# Altium PCB PCB_D1 mini AHT20 BMP150_2022-06-01.pcbdoc
Units mil, origin at the board's own origin, x right, y up, seen from the top; angles counter-clockwise.
Board outline 2010 x 2267.8 mil, 2 copper layers (Top Layer, Bottom Layer); 15 components, 24 nets, 67 pads, 5 vias.
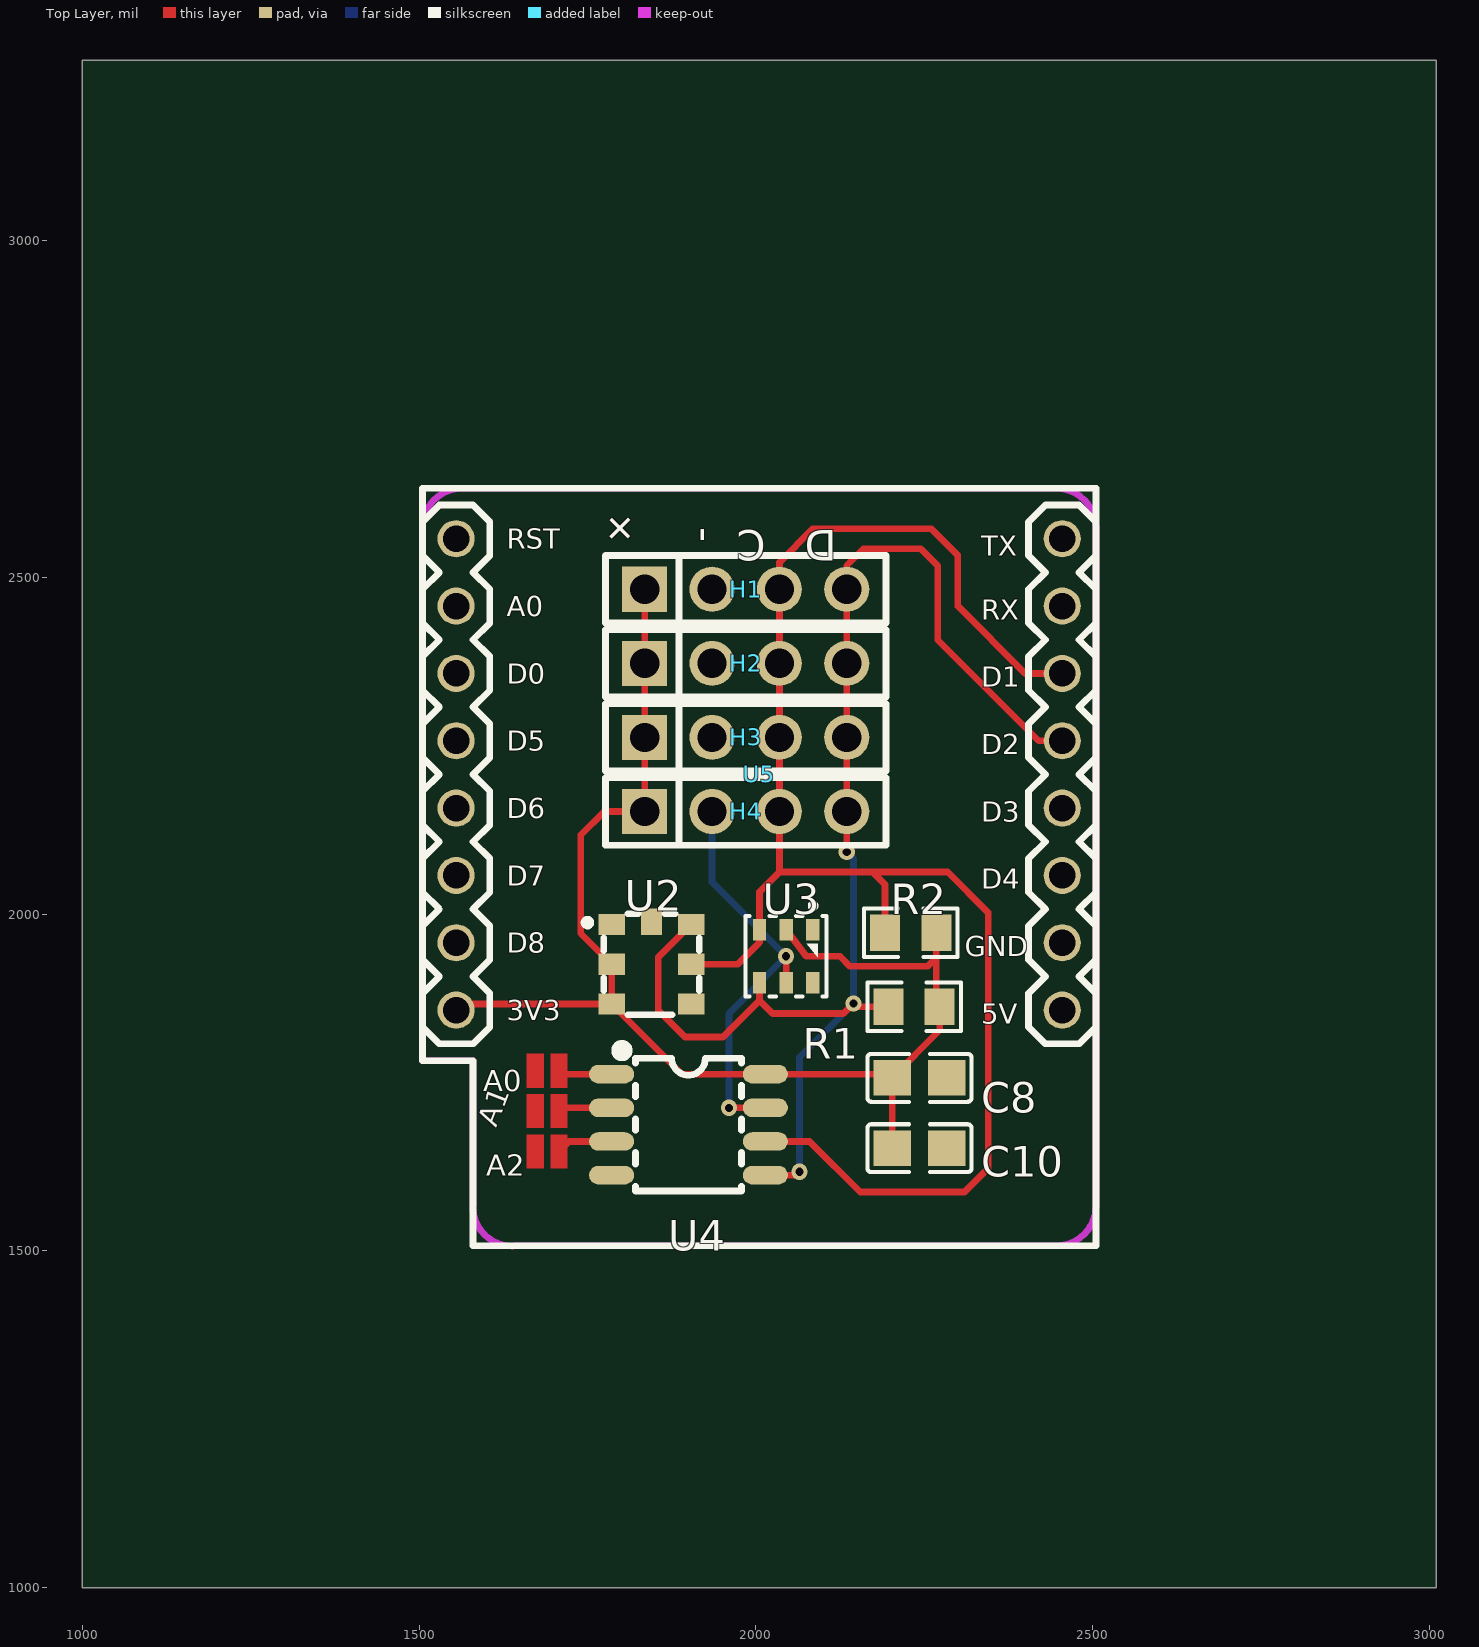
[diagram p0: Top Layer view]
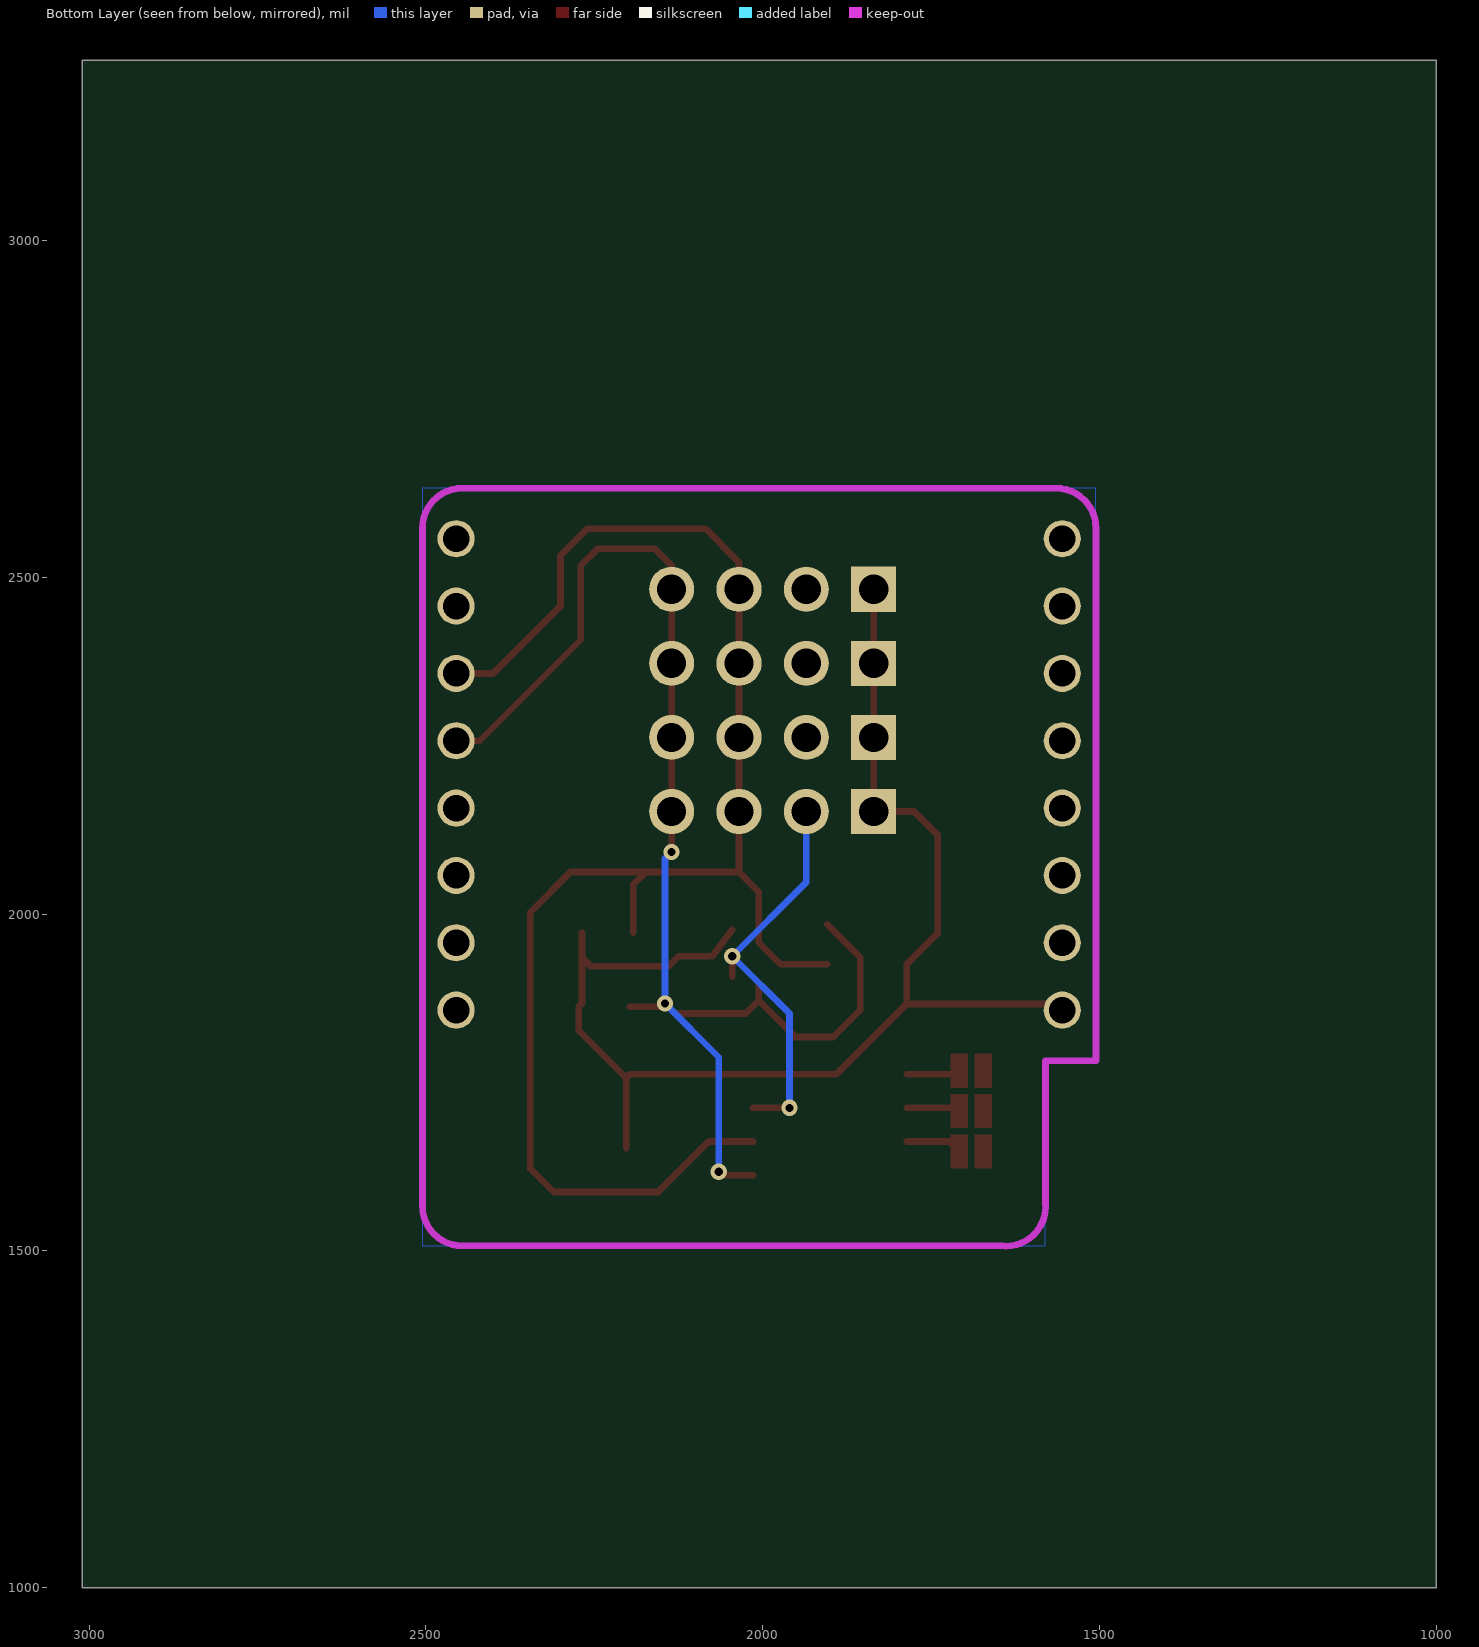
[diagram p1: Bottom Layer view, seen from below]

## Layer stack, top to bottom
Top Layer: signal copper (thickness not stored)
Dielectric: dielectric 12.6, FR-4, Dk 4.8
Bottom Layer: signal copper (thickness not stored)

## Board outline
3010,1000 1000,1000 1000,3267.8 3010,3267.8

## Components (designator, comment, footprint, x,y, rotation, side; value= is the part's Value field where it differs from the comment)
A0 "A0" PAD-JUMPER-2-NO_NO_SILK 1690,1767.5 r0 top
A1 "A1" PAD-JUMPER-2-NO_NO_SILK 1690,1707.5 r0 top
A2 "A2" PAD-JUMPER-2-NO_NO_SILK 1690,1647.5 r0 top
C8 "0.1u" C0805 2242.97,1756.97 r180 top
C10 "0.1u" C0805 2242.97,1652.5 r180 top
H1 "IO_EXT" HDR-TH_4P-P2.54-V-M 1985,2482.5 r0 top
H2 "IO_EXT" HDR-TH_4P-P2.54-V-M 1985,2372.5 r0 top
H3 "IO_EXT" HDR-TH_4P-P2.54-V-M 1985,2262.5 r0 top
H4 "IO_EXT" HDR-TH_4P-P2.54-V-M 1985,2152.5 r0 top
R1 "4.7K" R0805 2235,1862.5 r0 top
R2 "4.7K" R0805 2230,1972.5 r0 top
U2 "BMP180" LGA-7_L3.8-W3.6-P1.50-BL 1845,1927.5 r270 top
U3 "AHT20_C2757850" SENSOR-SMD_L3.0-W3.0-P1.00-BR 2045,1937.5 r90 top
U4 "AT24C512C-SSHM-T" SOP-8_L5.0-W4.0-P1.27-LS6.2-BL 1900,1687.5 r270 top
U5 "WEMOS-D1-MINI-SHIELD" WEMOS-D1-MINI-SHIELD 2005,2082.5 r0 top

## Footprints (in the part's own frame and the unit in brackets; to place one, negate y for a bottom-side part, rotate by r counter-clockwise, add the part's x,y. Pads: shape width x height; smd on the part's side, far side on the other; paste and mask are expansions set on the pad)
C0805 [mm]
  rect 1.41x1.35 smd: 1(-1.03,0) 2(1.03,0)
  silkscreen extent -1.96,-0.9 1.96,0.9
HDR-TH_4P-P2.54-V-M [mm]
  rect 1.7x1.7 hole 1.1: 1(-3.81,0)
  round 1.7 hole 1.1: 2(-1.27,0) 3(1.27,0) 4(3.81,0)
  silkscreen extent -5.29,-1.27 5.29,1.27
LGA-7_L3.8-W3.6-P1.50-BL [mil]
  rect 31.5x39.4 smd: 1(-57,-59) 2(2,-59) 3(61,-59) 4(61,59) 5(2,59) 6(-57,59)
  rect 39.4x31.5 smd: 7(-61,0)
  silkscreen extent -73,-100 77,71
PAD-JUMPER-2-NO_NO_SILK [mil]
  round 0 smd: 1(-17.72,0) 2(17.72,0)
  Top Layer region: -30.22,25 -5.22,25 -5.22,-25 -30.22,-25
  Top Layer region: 5.22,25 30.22,25 30.22,-25 5.22,-25
R0805 [mil]
  rect 44.59x54.21 smd: 1(-38.04,0) 2(38.04,0)
  silkscreen extent -69,-36 69,36
SENSOR-SMD_L3.0-W3.0-P1.00-BR [mm]
  rect 0.8x0.5 smd: 1(1,-1) 2(1,0) 3(1,1) 4(-1,1) 5(-1,0) 6(-1,-1)
  silkscreen extent -1.52,-1.52 2,1.52
SOP-8_L5.0-W4.0-P1.27-LS6.2-BL [mm]
  oval 0.7x1.7 smd: 1(-1.905,-2.9) 2(-0.635,-2.9) 3(0.635,-2.9) 4(1.905,-2.9) 5(1.905,2.9) 6(0.635,2.9) 7(-0.635,2.9) 8(-1.905,2.9)
  silkscreen extent -2.99,-2.71 2.5,2
WEMOS-D1-MINI-SHIELD [mil]
  round 55.1 hole 39.4: JP1.1(-450,475) JP1.2(-450,375) JP1.3(-450,275) JP1.4(-450,175) JP1.5(-450,75) JP1.6(-450,-25) JP1.7(-450,-125) JP1.8(-450,-225) JP2.1(450,475) JP2.2(450,375) JP2.3(450,275) JP2.4(450,175) JP2.5(450,75) JP2.6(450,-25) JP2.7(450,-125) JP2.8(450,-225)
  silkscreen extent -500,-575 500,550

## Via types
v1: diameter 24, hole 12, Top Layer to Bottom Layer, tented both sides, 5 vias

## Nets (pads, with @x,y where several pads share a name; then routed paths per layer and width w, separated by ;. In a path a pad name is that pad's centre, name@x,y a point inside that pad or via, vN(x,y) a via of type N, cw(c..) or ccw(c..) an arc to the next point about the centre after c; other vN are vias at no path point)
3.3V: C8.2 C10.2 H1.1 H2.1 H3.1 H4.1 R1.2 R2.2 U2.2 U2.3 U3.2 U4.8 U5.JP1.8 | length 2043.5
  Top Layer w10: U5.JP1.8 1564,1866.5 U2.3 ; H1.1@1835,2477.5 H2.1 H3.1 H4.1 1775,2152.5 1740,2117.5 1740,1971.5 U2.2 U2.3 ; U3.2 2075,1937.5 2125,1937.5 2140,1922.5 2255,1922.5 2268,1935.5 R2.2 ; C10.2 C8.2 ; R2.2 2268.04,1867.5 R1.2 2273.04,1827.59 C8.2 ; U2.3 1890,1762.5 U4.8 2196.89,1762.5 C8.2
A0: A0.2 U4.1 | length 80.2
  Top Layer w10: A0.2 1712.72,1762.5 U4.1
A1: A1.2 U4.2 | length 80.2
  Top Layer w10: A1.2 1712.72,1712.5 U4.2
A2: A2.2 U4.3 | length 84.3
  Top Layer w10: A2.2 1722.72,1662.5 U4.3
GND: A0.1 A1.1 A2.1 C8.1 C10.1 H1.2 H2.2 H3.2 H4.2 U2.7 U3.5 U4.4 U4.7 U5.JP2.7 | length 604.9
  Top Layer w10: v1(1960,1712.5) U4.7 ; U3.5@2045,1907.5 v1(2045,1937.5)
  Bottom Layer w10: H4.2 1935,2047.5 v1(2045,1937.5) 1960,1852.5 v1(1960,1712.5)
S$151: 
SCL: H1.3 H2.3 H3.3 H4.3 R2.1 U2.5 U3.3 U4.6 U5.JP2.3 | length 2454.3
  Top Layer w10: U2.5 1973,1925.5 2005.63,1958.13 U3.3 2005.63,2033.13 2035,2062.5 ; U4.6 2080,1662.5 2155,1587.5 2310,1587.5 2345,1622.5 2345,2002.5 2285,2062.5 2035,2062.5 ; 2173.36,2062.5 2191.96,2043.9 R2.1 ; U5.JP2.3 2400,2357.5 2300,2457.5 2300,2532.5 2260,2572.5 2085,2572.5 2035,2522.5 2035,2477.5 H2.3 H3.3 H4.3 2035,2062.5
SDA: H1.4 H2.4 H3.4 H4.4 R1.1 U2.6 U3.4 U4.5 U5.JP2.4 | length 2073.9
  Top Layer w10: U2.6 1855,1935.5 1855,1857.5 1895,1817.5 1951.26,1817.5 2005.63,1871.87 ; U3.4 2005.63,1871.87 ; U4.5 2060,1612.5 v1(2065,1617.5) ; v1(2135,2092.5) H4.4 H3.4 H2.4 2135,2477.5 2135,2517.5 2160,2542.5 2245,2542.5 2270,2517.5 2270,2407.5 2420,2257.5 U5.JP2.4 ; R1.1 2150,1862.5 v1(2145,1867.5) 2130,1852.5 2025,1852.5 2005.63,1871.87
  Bottom Layer w10: v1(2065,1617.5) 2065,1787.5 v1(2145,1867.5) 2145,2082.5 v1(2135,2092.5)
U2_1: U2.1
U2_4: U2.4
U3_1: U3.1
U3_6: U3.6
U5_JP1.1: U5.JP1.1
U5_JP1.2: U5.JP1.2
U5_JP1.3: U5.JP1.3
U5_JP1.4: U5.JP1.4
U5_JP1.5: U5.JP1.5
U5_JP1.6: U5.JP1.6
U5_JP1.7: U5.JP1.7
U5_JP2.1: U5.JP2.1
U5_JP2.2: U5.JP2.2
U5_JP2.5: U5.JP2.5
U5_JP2.6: U5.JP2.6
U5_JP2.8: U5.JP2.8

## Polygon pours and split planes (outlines as drawn)
GND on Bottom Layer (solid): 2505,2632.5 2505,1507.5 1580,1507.5 1580,1782.5 1505,1782.5 1505,2632.5 2505,2632.5
GND on Top Layer (solid): 1580,1507.5 1580,1782.5 1505,1782.5 1505,2632.5 2505,2632.5 2505,1507.5 1580,1507.5

## Keep-outs
Keep-Out Layer:
  lines w10: 1505,2573.44 cw(c1564.05,2573.44) 1564.05,2632.5 ; 1579.68,1566.12 ccw(c1638.74,1566.12) 1638.74,1507.06 ; 2445.94,1507.5 ccw(c2445.94,1566.55) 2505,1566.55 ; 2445.94,2632.5 cw(c2445.94,2573.44) 2505,2573.44

## Silkscreen, mask and mechanical layers (free items; w line width, h text height)
Top Overlay:
  text "C" at 2015,2570 h45 r180
  text "D" at 2120,2570 h45 r180
  text "+" at 1830.91,2568.41 h45 r135
  text "-" at 1937.5,2552.5 h45 r90

## Text inside footprints (layer, text, board x,y; h text height)
U5: Top Overlay "D7" at 1630,2042.5 h30; Top Overlay "D5" at 1630,2242.5 h30; Top Overlay "D8" at 1630,1942.5 h30; Top Overlay "3V3" at 1630,1842.5 h30; Top Overlay "D0" at 1630,2342.5 h30; Top Overlay "A0" at 1630,2442.5 h30; Top Overlay "RST" at 1630,2542.5 h30; Top Overlay "TX" at 2335,2532.5 h30; Top Overlay "RX" at 2335,2437.5 h30; Top Overlay "D1" at 2335,2337.5 h30; Top Overlay "D2" at 2335,2237.5 h30; Top Overlay "D3" at 2335,2137.5 h30; Top Overlay "D4" at 2335,2037.5 h30; Top Overlay "GND" at 2310,1937.5 h30; Top Overlay "5V" at 2335,1837.5 h30; Top Overlay "D6" at 1630,2142.5 h30